# Altium PCB ase_flap.PcbDoc
Units mm, origin at the board's own origin, x right, y up, seen from the top; angles counter-clockwise.
Board outline 51.05 x 46.99 mm, 4 copper layers (Top Layer, Under top, Under bottom, Bottom Layer); 76 components, 52 nets, 266 pads, 103 vias.
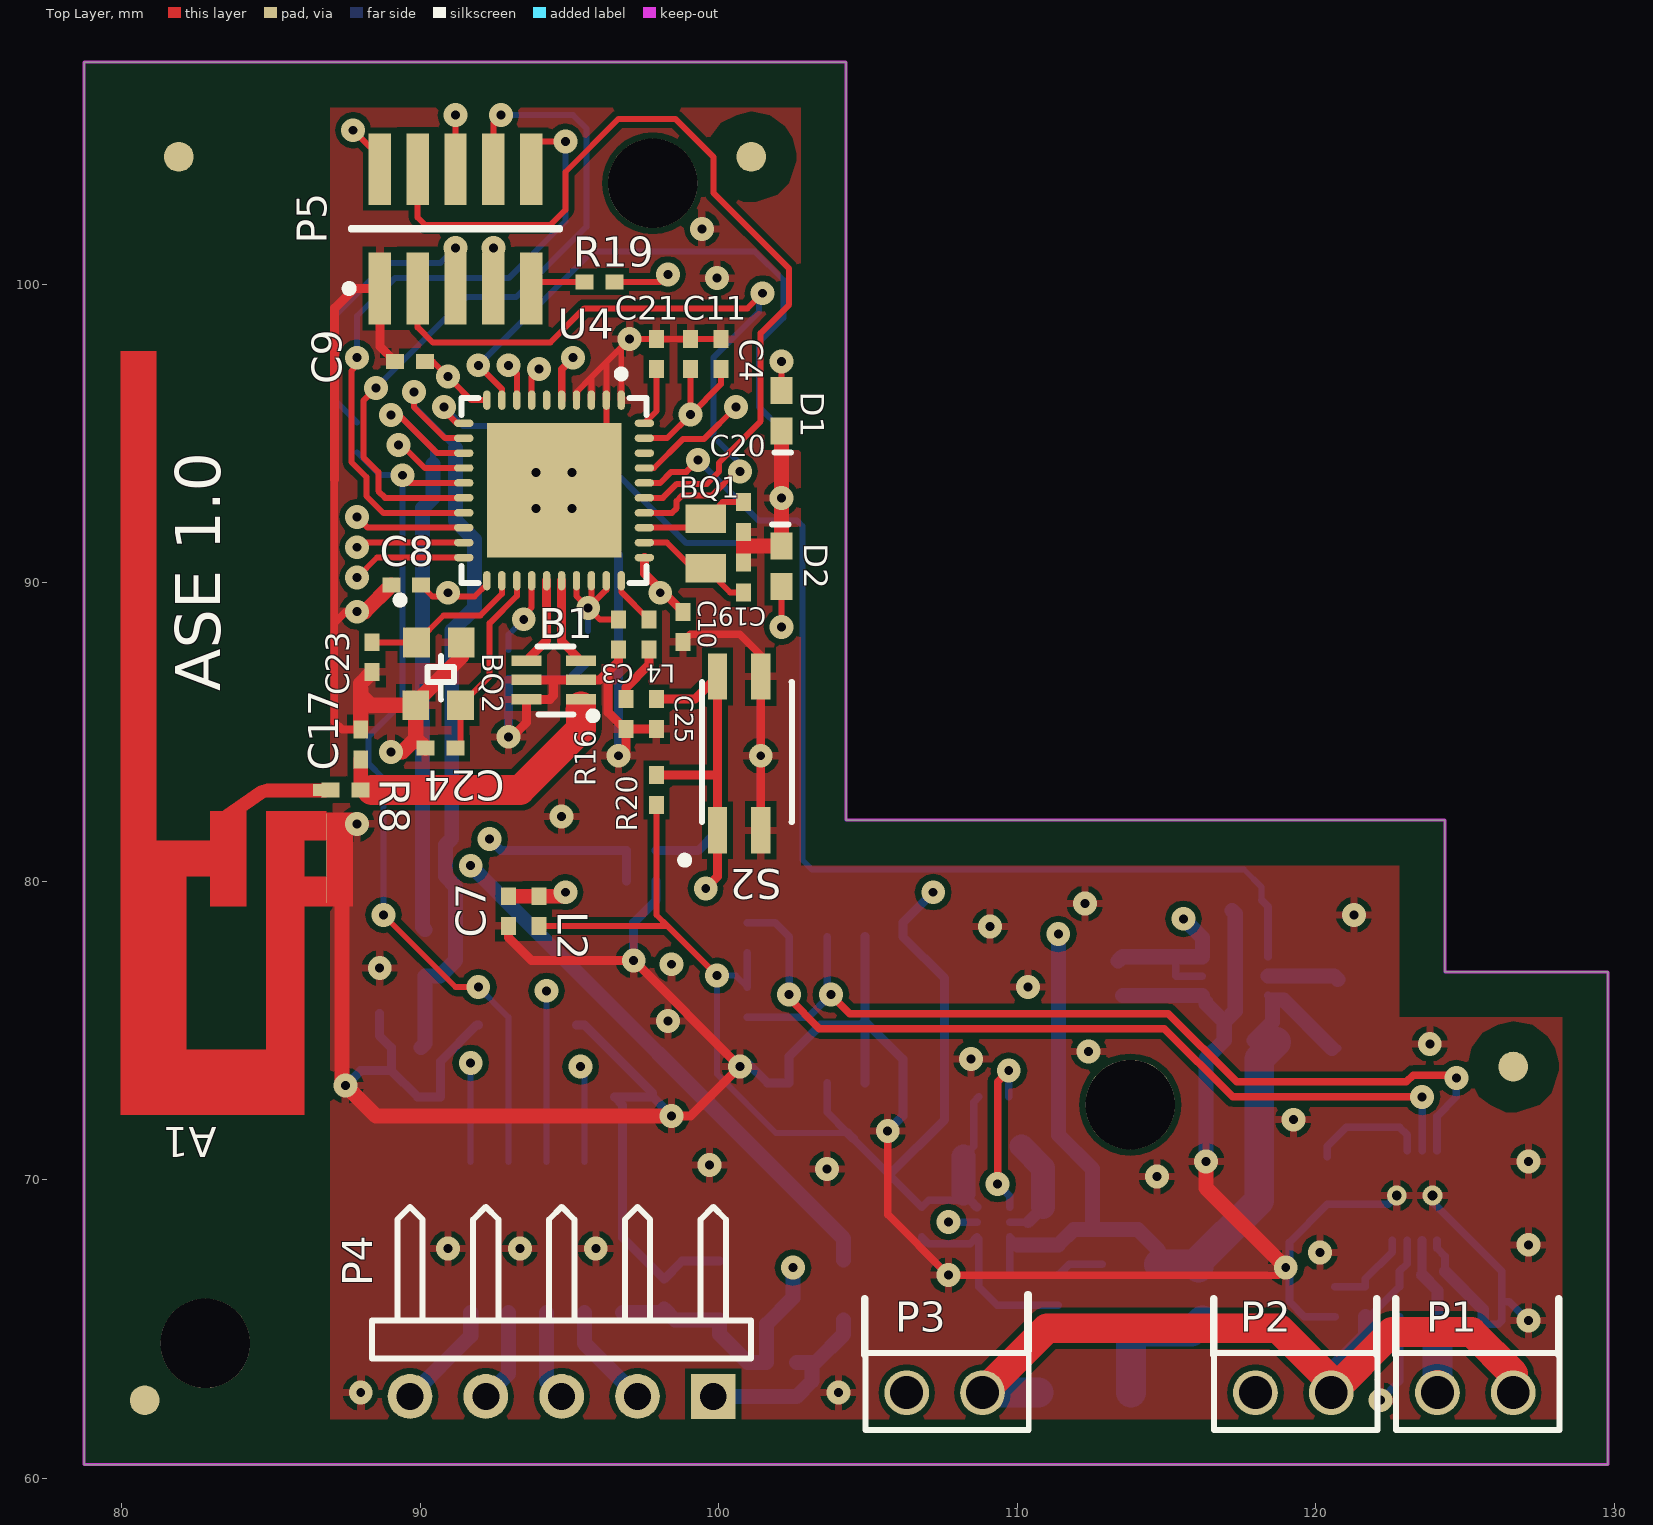
[diagram p0: Top Layer view]
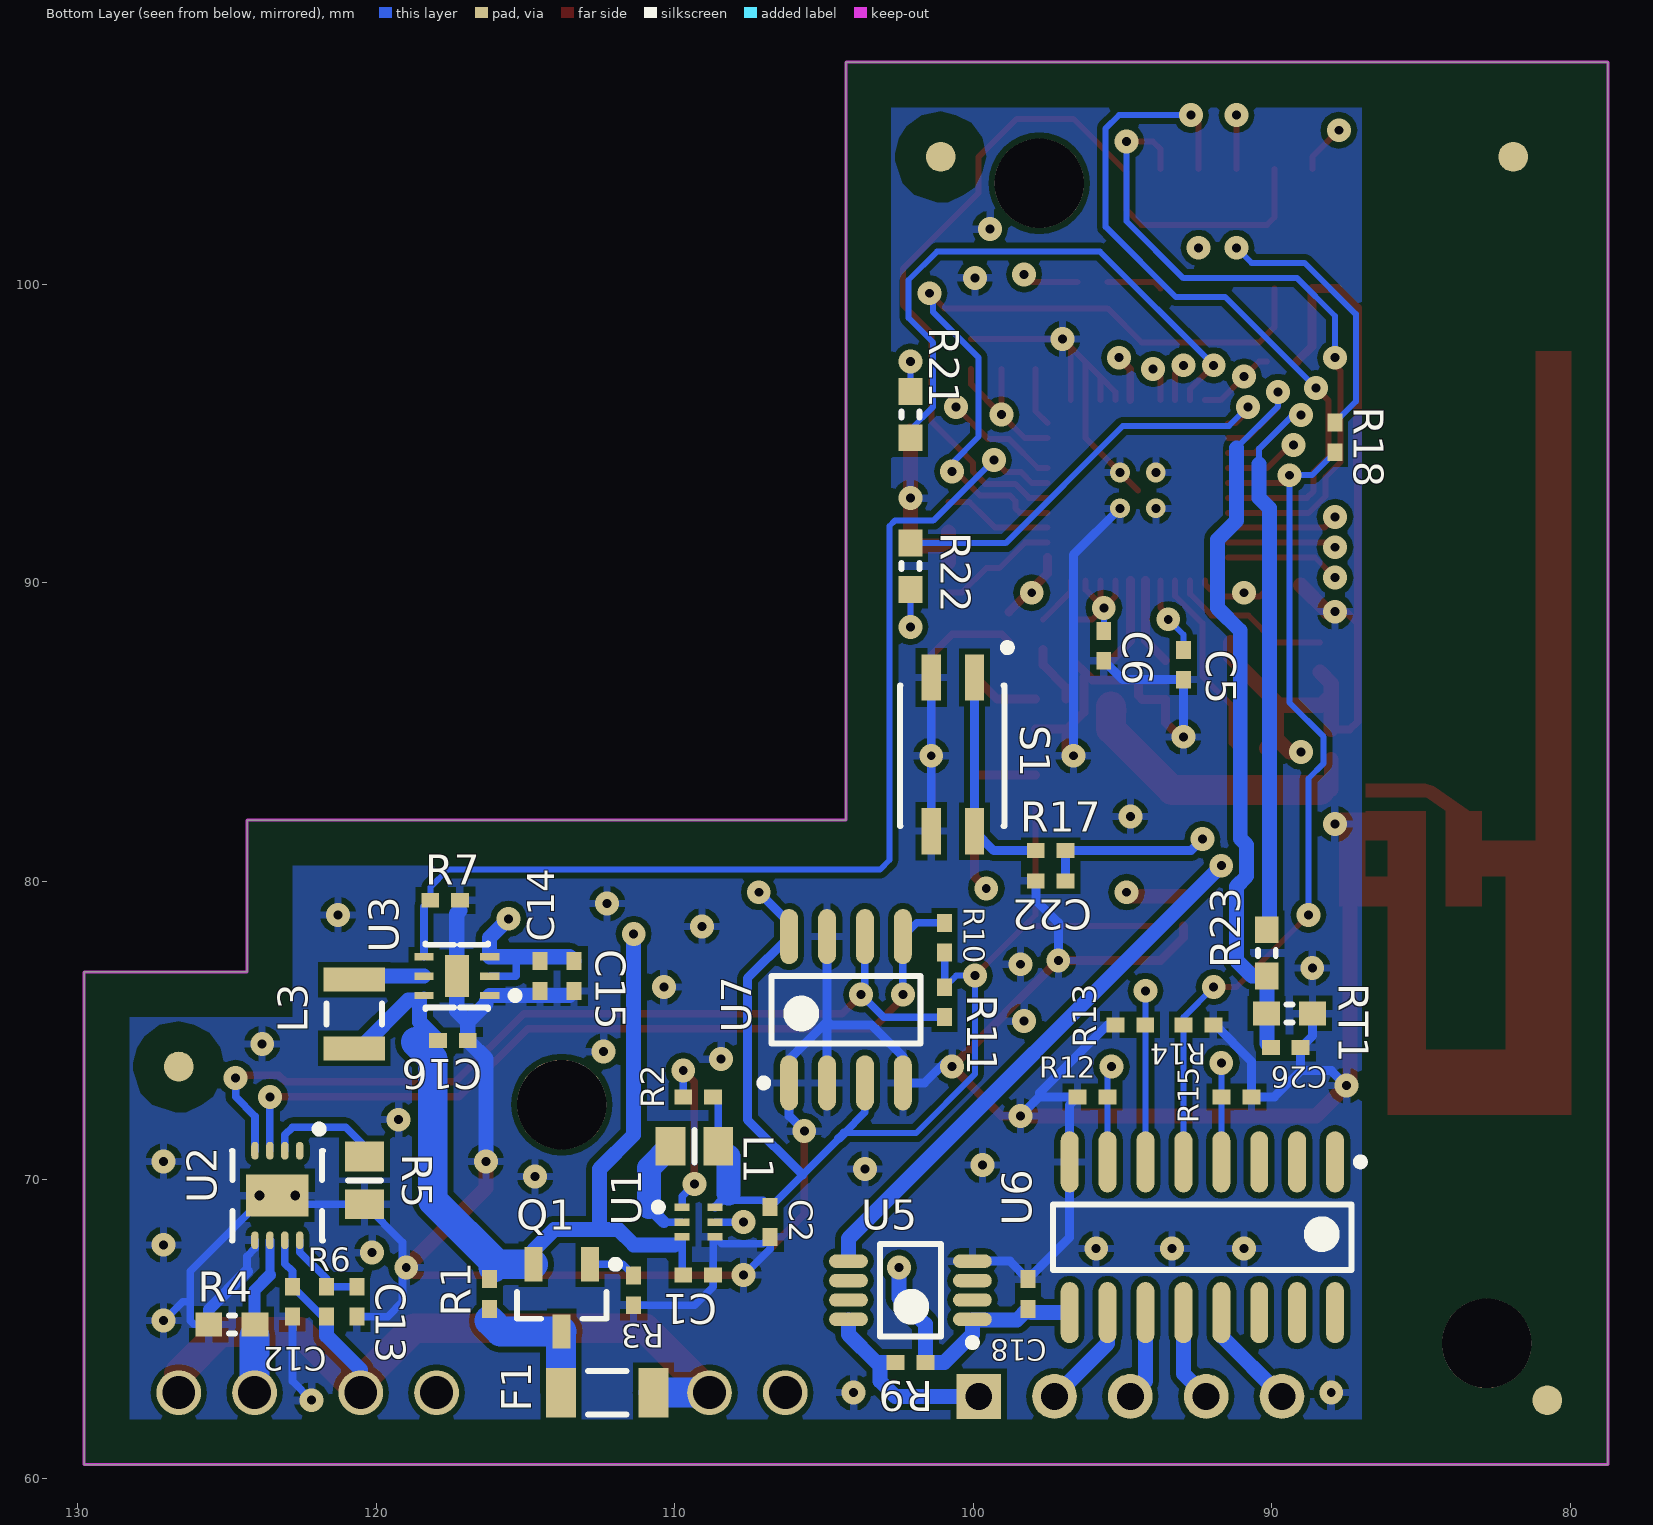
[diagram p1: Bottom Layer view, seen from below]
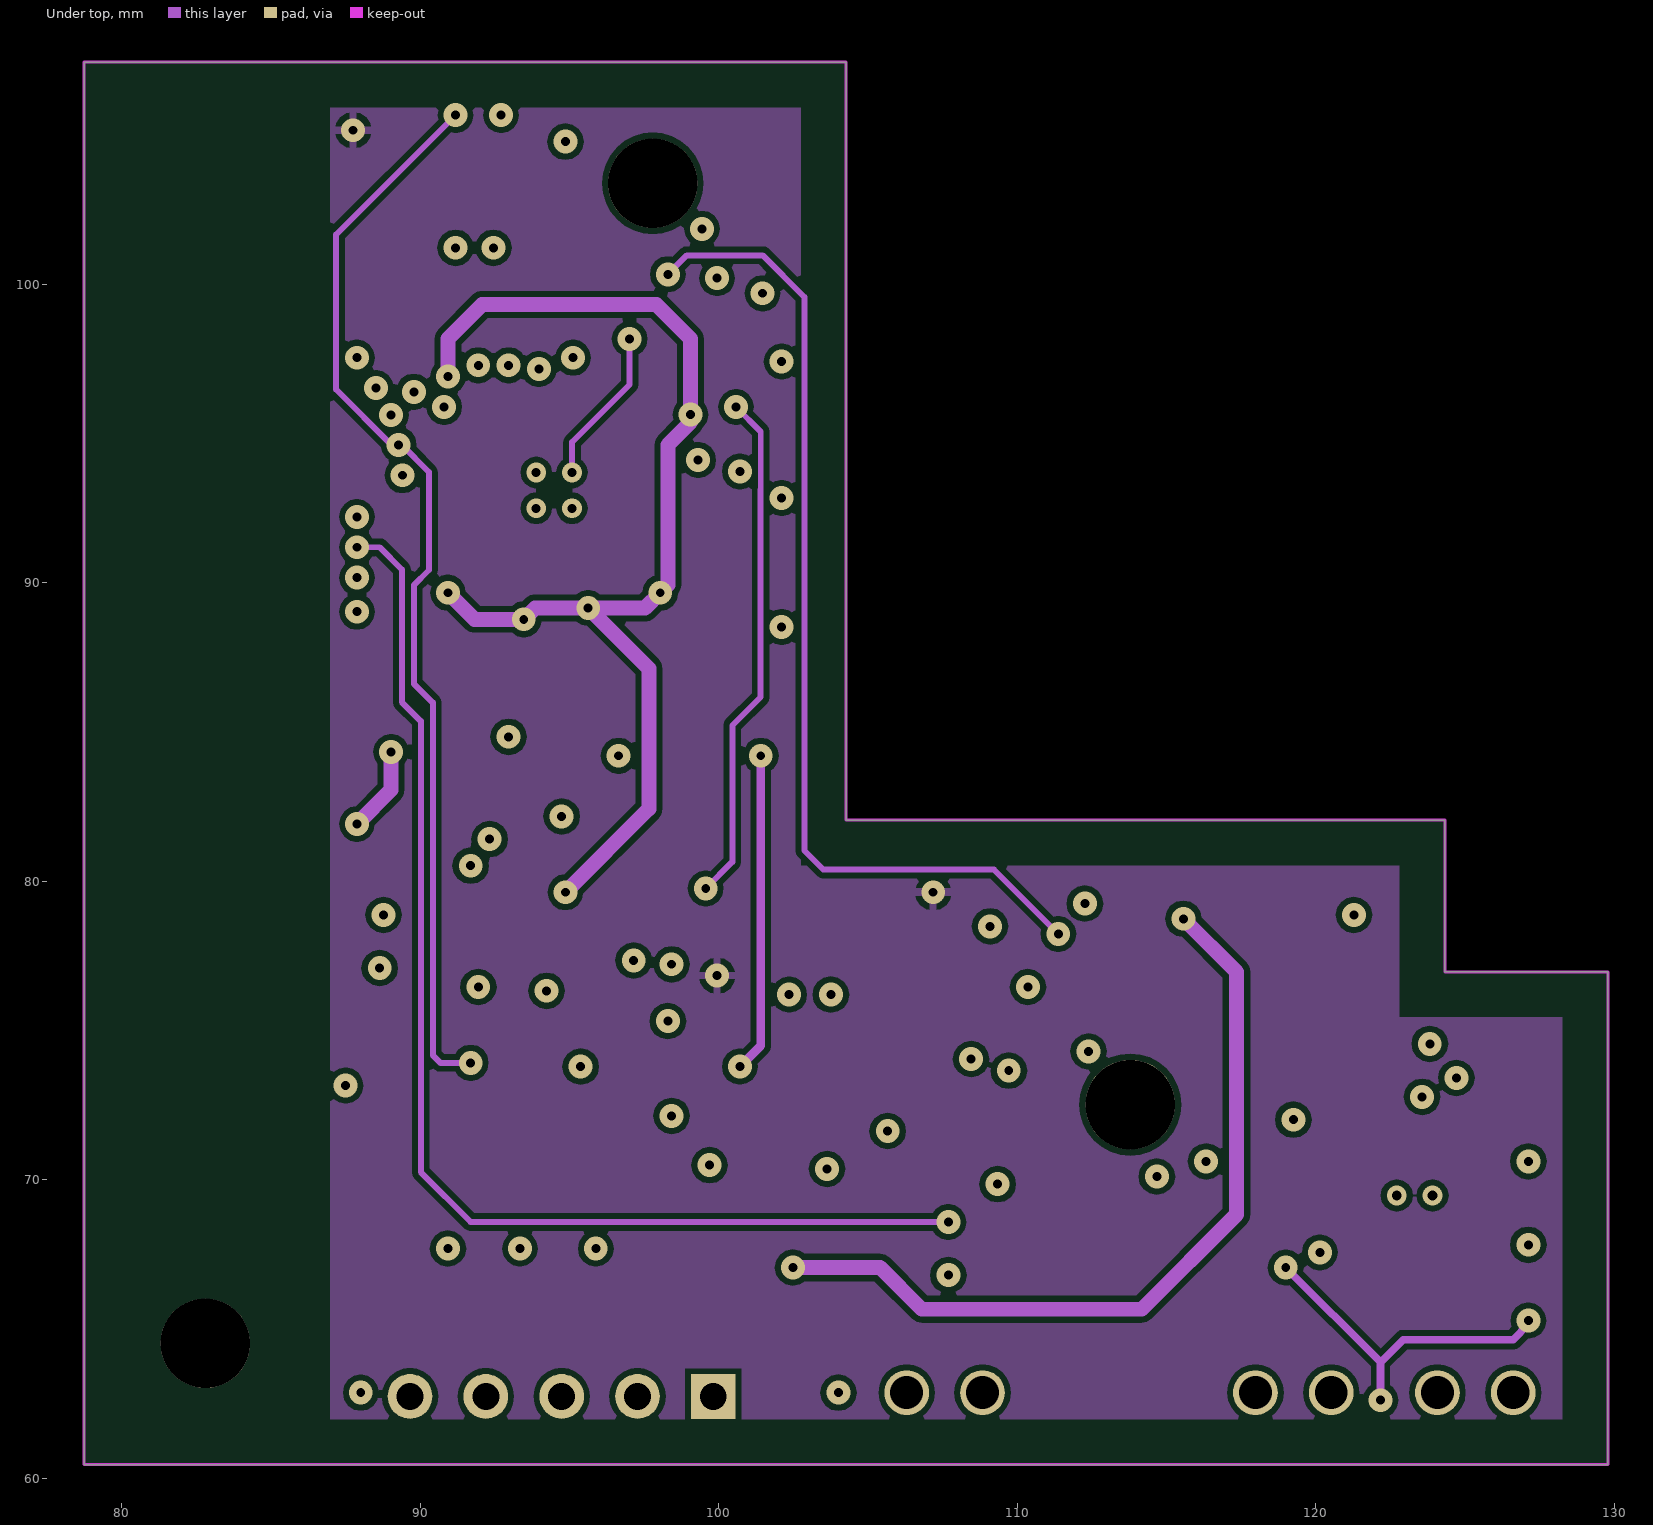
[diagram p2: Under top]
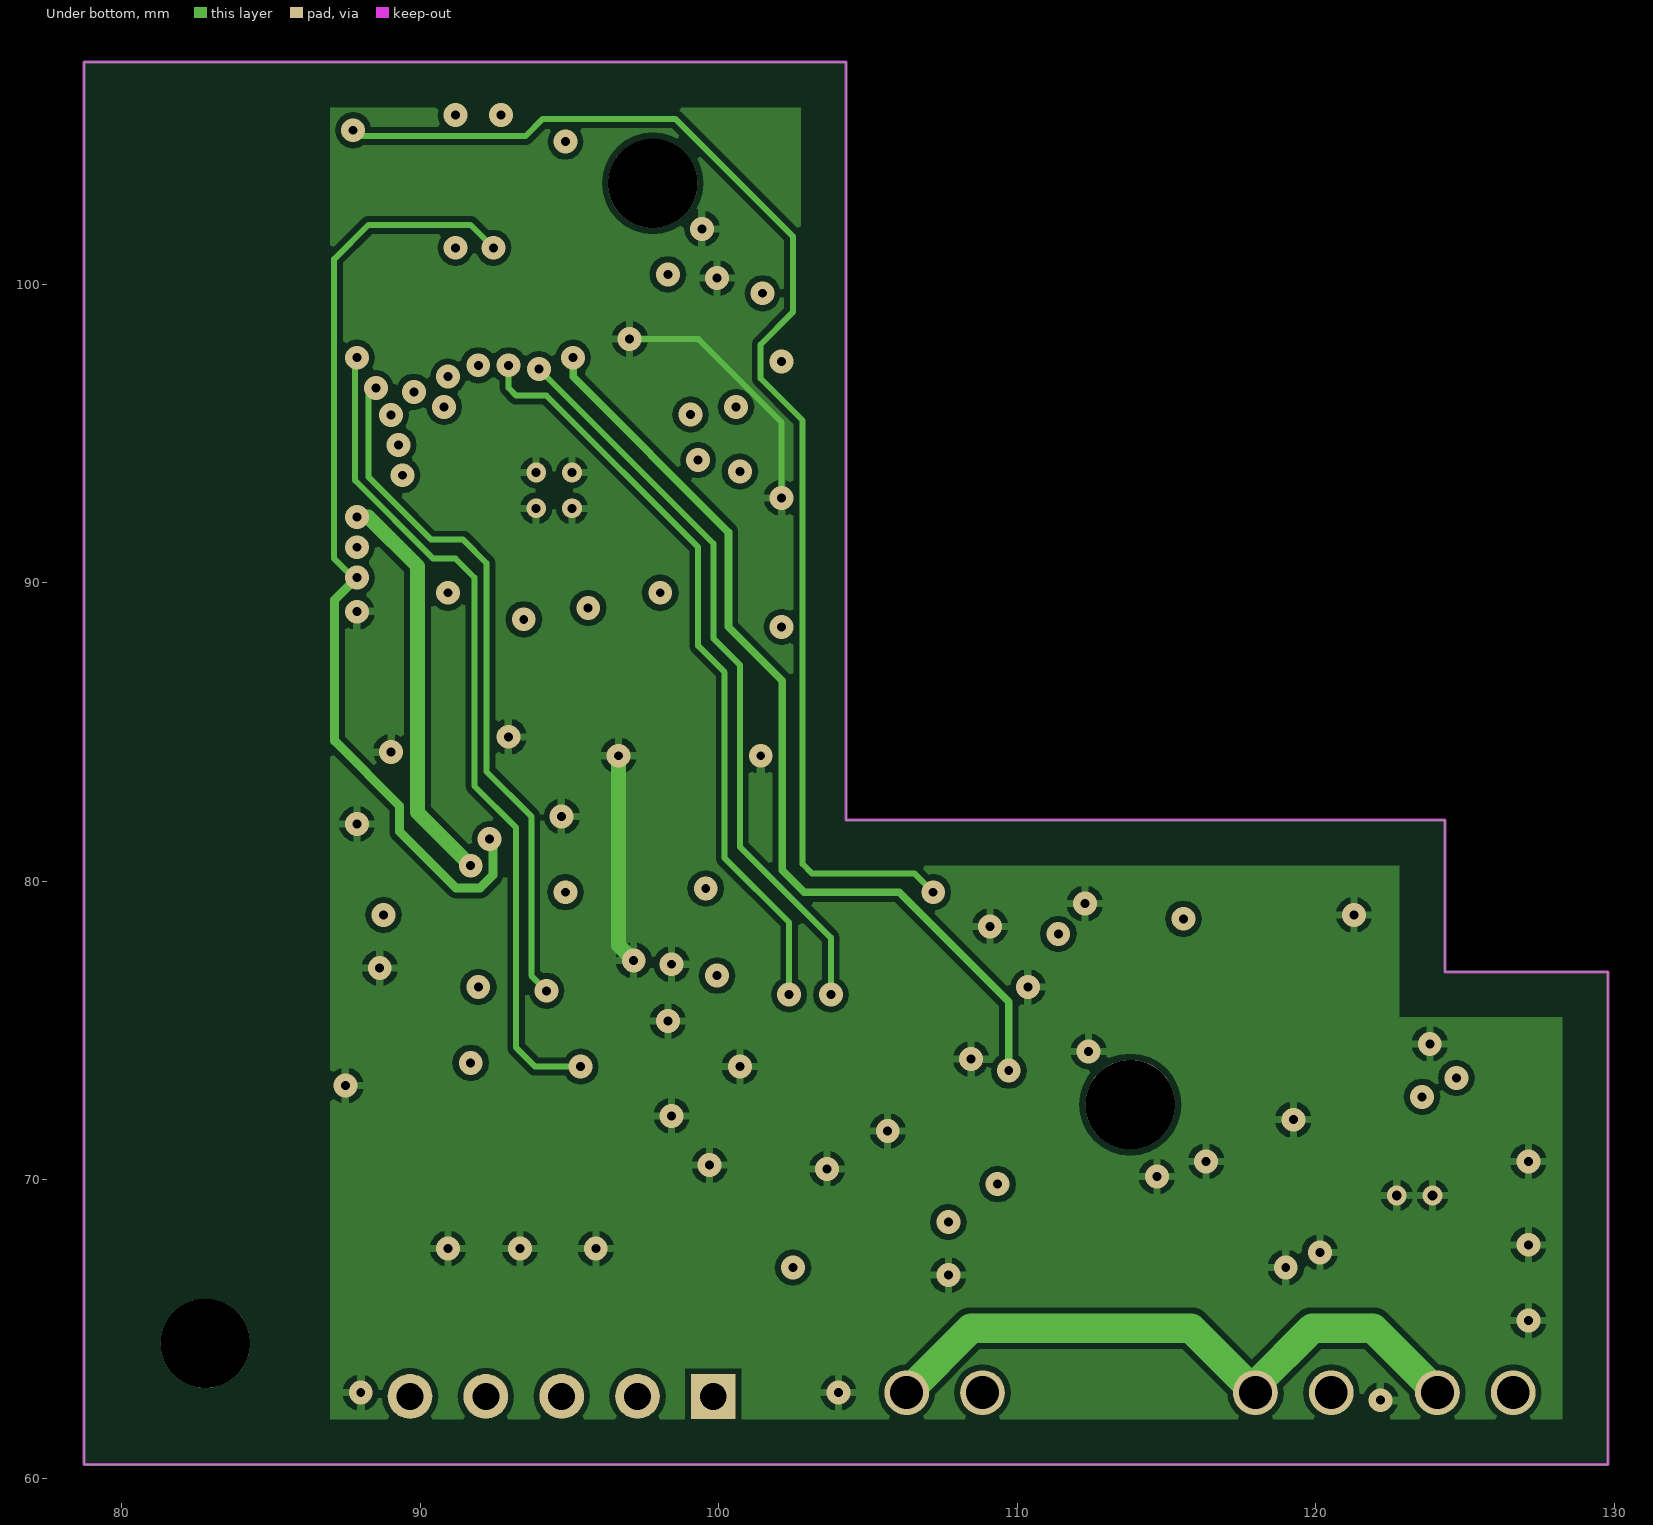
[diagram p3: Under bottom]

## Layer stack, top to bottom
Top Layer: signal copper 0.0356
Dielectric: core 0.32, FR-4, Dk 4.8
Under top: signal copper 0.0356
Dielectric: prepreg 0.32, FR-4, Dk 4.8
Under bottom: signal copper 0.0356
Dielectric: core 0.32, FR-4, Dk 4.8
Bottom Layer: signal copper 0.0356

## Board outline
78.74,60.452 78.74,107.442 104.267,107.442 104.267,82.042 124.333,82.042 124.333,76.962 129.794,76.962 129.794,60.452

## Design rules (kind name [scope] priority, off if disabled: settings)
Clearance [All] p1: gap=0.2
PolygonConnect [All] p1: connectstyle=Relief reliefconductorwidth=0.254 reliefentries=4 polygonreliefangle="90 Angle"
RoutingVias [All] p1: holewidth=0.711 width=1.27 viastyle="Through Hole" minholewidth=0.711 minwidth=1.27 maxholewidth=0.711 maxwidth=1.27
SilkscreenOverComponentPads [All] p1: minsilkscreentomaskgap=0.254
SolderMaskExpansion [All] p1: expansion=0
Width [All] p1: maxlimit=1 minlimit=0.2 preferedwidth=0.254
27 further rules are at their usual default settings.

## Components (designator, comment, footprint, x,y, rotation, side; value= is the part's Value field where it differs from the comment)
A1 "ANT" "F ant" 86.868,82.804 r90 top
B1 "BALUN" 2450BM15A0002 94.488,86.741 r180 top
BQ1 "Crystal" FC-12M 99.568,91.313 r90 top
BQ2 "Crystal" 403C11A32M00000 90.678,86.868 r270 top
C1 "Capacitor" 0402 109.22,66.802 r180 bottom
C2 "Capacitor" 0402 106.807,68.58 r270 bottom
C3 "Capacitor" 0402 96.647,88.265 r270 top
C4 "Capacitor" 0402 100.076,97.663 r90 top
C5 "Capacitor" 0402 92.964,87.249 r270 bottom
C6 "Capacitor" 0402 95.631,87.884 r270 bottom
C7 "Capacitor" 0402 92.964,78.994 r270 top
C8 "Capacitor" 0402 89.535,89.916 r180 top
C9 "Capacitor" 0402 89.662,97.409 r180 top
C10 "Capacitor" 0402 98.806,88.519 r270 top
C11 "Capacitor" 0402 99.06,97.663 r90 top
C12 "Capacitor" 0402 122.809,65.913 r270 bottom
C13 "Capacitor" 0402 120.65,65.913 r270 bottom
C14 "Capacitor" 0402 114.519,76.82 r270 bottom
C15 "Capacitor" 0402 113.376,76.82 r270 bottom
C16 "Capacitor" 0402 117.44,74.661 r180 bottom
C17 "Capacitor" 0402 88.011,84.582 r90 top
C18 "Capacitor" 0402 98.171,66.167 r90 bottom
C19 "Capacitor" 0402 100.838,90.17 r270 top
C20 "Capacitor" 0402 100.838,92.202 r90 top
C21 "Capacitor" 0402 97.917,97.663 r90 top
C22 "Capacitor" 0402 97.409,80.01 r0 bottom
C23 "Capacitor" 0402 88.392,87.503 r90 top
C24 "Capacitor" 0402 90.678,84.455 r0 top
C25 "Capacitor" 0402 97.917,85.598 r270 top
C26 "Capacitor" 0402 89.535,74.422 r180 bottom
D1 "Led" LED0603 102.108,95.758 r270 top
D2 "Led" LED0603 102.108,90.551 r90 top
F1 "Fuse, slow 0,5A" SF1206S0502 112.268,62.865 r0 bottom
L1 "Inductor" 6-0805_L 109.347,71.12 r180 bottom
L2 "Inductor" 0402 93.98,78.994 r90 top
L3 "Inductor" 1008 120.742,75.55 r90 bottom
L4 "Inductor" 0402 97.663,88.265 r90 top
P1 "Connector" BAT_CON 126.619,62.865 r180 top
P2 "Connector" BAT_CON 120.523,62.865 r180 top
P3 "Connector" BAT_CON 108.839,62.865 r180 top
P4 "24BYJ48" HDR1X5H 99.822,62.738 r180 top
P5 "*" 20021121-00010C4LF 91.186,101.854 r90 top
Q1 "IRLML6302GTRPBF" SOT-23_N 113.792,66.04 r270 bottom
R1 "Blob" 0402 116.205,66.167 r270 bottom
R2 "Resistor" 0402 109.22,72.771 r0 bottom
R3 "Resistor" 0402 111.379,66.294 r270 bottom
R4 "Resistor" 0603 124.841,65.151 r0 bottom
R5 "Resistor" 6-0805_L 120.396,69.977 r270 bottom
R6 "Resistor" 0402 121.666,65.913 r90 bottom
R7 "Resistor" 0402 117.694,79.36 r180 bottom
R8 "Blob" 0402 87.503,83.058 r180 top
R9 "Resistor" 0402 102.108,63.881 r180 bottom
R10 "Resistor" 0402 100.965,78.105 r270 bottom
R11 "Resistor" 0402 100.965,75.946 r90 bottom
R12 "Resistor" 0402 96.012,72.771 r0 bottom
R13 "Resistor" 0402 94.742,75.184 r0 bottom
R14 "Resistor" 0402 92.456,75.184 r180 bottom
R15 "Resistor" 0402 91.186,72.771 r180 bottom
R16 "Resistor" 0402 96.901,85.598 r270 top
R17 "Resistor" 0402 97.409,81.026 r180 bottom
R18 "Blob" 0402 87.884,94.869 r270 bottom
R19 "Blob" 0402 96.012,100.076 r0 top
R20 "Resistor" 0402 97.917,83.058 r90 top
R21 "Resister" 0603 102.108,95.631 r270 bottom
R22 "Resister" 0603 102.108,90.551 r90 bottom
R23 "Resistor" 0603 90.17,77.597 r90 bottom
RT1 "Thermistor" 0603 89.408,75.565 r180 bottom
S1 "Button" EVQP2402W 100.711,84.201 r270 bottom
S2 "Button" EVQP2402W 100.711,84.328 r90 top
U1 "TPS62730" 6SON 109.205,68.58 r180 bottom
U2 "STC3100" DFN8 123.317,69.469 r270 bottom
U3 "TPS61240DRVT" WSON6 117.305,76.82 r0 bottom
U4 "CC2530F256" QFN40 94.488,93.091 r270 top
U5 "AD8217BRMZ-R7" 8MSOP 102.108,66.294 r0 bottom
U6 "ULN2003ADR" 16SOIC 92.329,68.072 r270 bottom
U7 "M24M02" SO8 104.267,75.692 r90 bottom

## Footprints (in the part's own frame and the unit in brackets; to place one, negate y for a bottom-side part, rotate by r counter-clockwise, add the part's x,y. Pads: shape width x height; smd on the part's side, far side on the other; paste and mask are expansions set on the pad)
6-0805_L [mm] "Chip Resistor, Body 2.0x1.2mm, IPC High Density"
  rect 1x1.3 smd: 1(-0.8,0) 2(0.8,0)
  silkscreen extent 0,-0.55 0,0.55, body extent -1.07,-0.7 1.07,0.7, height 0.7
6SON [mm] "IC DCDC CONV STP-DN SYNC LP 6SON"
  rect 0.5x0.25 smd: 1(-0.55,0.5) 2(-0.55,0) 3(-0.55,-0.5) 4(0.55,-0.5) 5(0.55,0) 6(0.55,0.5)
  silkscreen extent -1.48,0.38 -1.23,0.62, body extent -0.52,-0.75 0.53,0.75, height 0.6
8MSOP [mm] "MSOP, 8-Leads, Body 3,1x3,1mm (max), Pitch 0,65mm, IPC High Density"
  oval 1.3x0.45 smd: 1(-2.075,0.975) 2(-2.075,0.325) 3(-2.075,-0.325) 4(-2.075,-0.975) 5(2.075,-0.975) 6(2.075,-0.325) 7(2.075,0.325) 8(2.075,0.975)
  silkscreen extent -2.2,-1.55 1.02,1.87, body extent -1.55,-1.55 1.55,1.55, height 1.1
16SOIC [mm] "TRANS 7 NPN DARL 50V 500MA 16SO"
  oval 2.05x0.6 smd: 1(-2.525,4.445) 2(-2.525,3.175) 3(-2.525,1.905) 4(-2.525,0.635) 5(-2.525,-0.635) 6(-2.525,-1.905) 7(-2.525,-3.175) 8(-2.525,-4.445) 9(2.525,-4.445) 10(2.525,-3.175) 11(2.525,-1.905) 12(2.525,-0.635) 13(2.525,0.635) 14(2.525,1.905) 15(2.525,3.175) 16(2.525,4.445)
  silkscreen extent -2.65,-5 1.1,5.42, body extent -2,-5 2,5, height 1.75
0402 [mm] "Chip Capacitor, Body 1.0x0.5mm, IPC High Density"
  rect 0.6x0.5 smd: 1(-0.5,0) 2(0.5,0)
  body extent -0.55,-0.3 0.55,0.3, height 1.3
403C11A32M00000 [mm] "CRYSTAL 32MHZ 10PF SMD"
  rect 1x0.9 smd: 1(-1.125,-0.8) 2(0.975,-0.825) 3(0.975,0.675) 4(-1.125,0.7)
  silkscreen extent -2.67,-1.47 0.77,0.45, body extent -1.7,-1.22 1.53,1.15, height 0.85
0603 [mm] "0603, 2-Leads, Body 1,6x0,8mm, IPC High Density"
  rect 0.9x0.8 smd: 1(-0.775,0) 2(0.775,0)
  silkscreen extent -0.1,-0.3 0.1,0.3, body extent -0.8,-0.4 0.8,0.4, height 0.5
1008 [mm]
  rect 0.8x2.05 smd: 1(-1.15,0) 2(1.15,0)
  silkscreen extent -0.35,-0.93 0.35,0.92, body extent -1.25,-1 1.25,1, height 0.6
2450BM15A0002 [mm]
  rect 1x0.35 smd: 1(-0.9,0.65) 2(-0.9,0) 3(-0.9,-0.65) 4(0.925,-0.65) 5(0.925,0) 6(0.925,0.65)
  silkscreen extent -1.43,-1.13 0.55,1.32, body extent -0.63,-1 0.63,1, height 0.7
20021121-00010C4LF [mm] "CONN HEADER 10POS DL UNSHRD SMD"
  rect 2.4x0.75 smd: 1(-2,2.54) 2(2,2.54) 3(-2,1.27) 4(2,1.27) 5(-2,0) 6(2,0) 7(-2,-1.27) 8(2,-1.27) 9(-2,-2.54) 10(2,-2.54)
  silkscreen extent -2.12,-3.5 0.02,3.69, body extent -0.75,-3.5 0.75,3.5, height 5
BAT_CON [mm]
  round 1.5 hole 1.1: 1(0,0) 2(2.54,0)
  silkscreen extent -1.55,-1.33 3.92,1.25
DFN8 [mm]
  oval 0.6x0.25 smd: 1(-1.5,0.75) 2(-1.5,0.25) 3(-1.5,-0.25) 4(-1.5,-0.75) 5(1.5,-0.75) 6(1.5,-0.25) 7(1.5,0.25) 8(1.5,0.75)
  rect 1.4x2.1 smd: 9(0,0)
  silkscreen extent -2.35,-1.53 1.5,1.53, body extent -1.5,-1.5 1.5,1.5, height 0.9
EVQP2402W [mm] "QFN, 4-Leads, Body 3,5x4,7mm (max), Pitch 1,70mm, IPC High Density"
  rect 1.55x0.65 smd: 1(-2.625,0.75) 2(-2.625,-0.7) 3(2.525,0.75) 4(2.525,-0.7)
  silkscreen extent -3.75,-1.75 2.35,1.97, body extent -2.35,-1.75 2.35,1.75, height 2.5
"F ant" [mm] "F antenna 2.4Ghz"
  rect 0.4x0.4 smd paste+0: 1(0.254,0.254)
  rect 3x0.01 smd: 2(-2.032,0)
  Top Layer region: 0,2.03 0.379,2.291 -0.577,3.681 -0.956,3.421
  Top Layer region: 0,0 0.46,0 0.46,2.03 0,2.03
  Top Layer region: -3.65,0.74 -0.45,0.74 -0.45,2.03 -3.65,2.03
  Top Layer region: -3.65,2.69 -0.45,2.69 -0.45,3.9 -3.65,3.9
  Top Layer region: -10.63,0.74 -8.45,0.74 -8.45,4.7 -10.63,4.7
  Top Layer region: -10.63,5.7 14.95,5.7 14.95,6.91 -10.63,6.91
  Top Layer region: -10.63,4.7 -1.45,4.7 -1.45,5.7 -10.63,5.7
  Top Layer region: -8.45,0.74 -3.575,0.74 -3.575,2.03 -8.45,2.03
  Top Layer region: -2.65,3.9 -1.45,3.9 -1.45,4.7 -2.65,4.7
  Top Layer region: -1.45,0 -0.45,0 -0.45,0.74 -1.45,0.74
  Top Layer region: -3.65,0 -2.65,0 -2.65,0.74 -3.65,0.74
  Top Layer region: 0,2.03 0.46,2.03 0.379,2.291
FC-12M [mm]
  rect 0.95x1.35 smd: 1(-0.825,0) 2(0.825,0)
  body extent -1.02,-0.6 1.02,0.6, height 0.6
HDR1X5H [mm] "Connector; Header; 5 Position; Right Angle"
  rect 1.5x1.5 hole 0.9: 1(0,0)
  round 1.5 hole 0.9: 2(2.54,0) 3(5.08,0) 4(7.62,0) 5(10.16,0)
  silkscreen extent -1.27,-6.35 11.43,-1.27
LED0603 [mm] "Molded Diode, 2-Leads, Body 1,7x0,9mm, IPC High Density"
  rect 0.9x0.75 smd: 1(-0.675,0) 2(0.675,0)
  silkscreen extent 1.4,-0.23 1.4,0.32, body extent -0.9,-0.5 0.9,0.5, height 0.85
QFN40 [mm]
  oval 0.65x0.25 smd: 1(-3.025,2.25) 2(-3.025,1.75) 3(-3.025,1.25) 4(-3.025,0.75) 5(-3.025,0.25) 6(-3.025,-0.25) 7(-3.025,-0.75) 8(-3.025,-1.25) 9(-3.025,-1.75) 10(-3.025,-2.25) 21(3.025,-2.25) 22(3.025,-1.75) 23(3.025,-1.25) 24(3.025,-0.75) 25(3.025,-0.25) 26(3.025,0.25) 27(3.025,0.75) 28(3.025,1.25) 29(3.025,1.75) 30(3.025,2.25)
  oval 0.25x0.65 smd: 11(-2.25,-3.025) 12(-1.75,-3.025) 13(-1.25,-3.025) 14(-0.75,-3.025) 15(-0.25,-3.025) 16(0.25,-3.025) 17(0.75,-3.025) 18(1.25,-3.025) 19(1.75,-3.025) 20(2.25,-3.025) 31(2.25,3.025) 32(1.75,3.025) 33(1.25,3.025) 34(0.75,3.025) 35(0.25,3.025) 36(-0.25,3.025) 37(-0.75,3.025) 38(-1.25,3.025) 39(-1.75,3.025) 40(-2.25,3.025)
  rect 4.5x4.5 smd: 41(0,0)
  silkscreen extent -4.02,-3.1 3.1,3.1, body extent -3.08,-3.08 3.08,3.08, height 1
SF1206S0502 [mm] "FUSE BOARD MNT 500MA 63VDC 1206"
  rect 1x1.65 smd: 1(-1.55,0) 2(1.55,0)
  silkscreen extent -0.65,-0.72 0.65,0.72, body extent -1.55,-0.77 1.55,0.77, height 0.6
SO8 [mm] "SOIC, 8-Leads, Body 5,0x4,0mm (max), Pitch 1,27mm, IPC High Density"
  oval 1.85x0.6 smd: 1(-2.45,1.905) 2(-2.45,0.635) 3(-2.45,-0.635) 4(-2.45,-1.905) 5(2.45,-1.905) 6(2.45,-0.635) 7(2.45,0.635) 8(2.45,1.905)
  silkscreen extent -2.57,-2.5 1.12,2.88, body extent -2,-2.5 2,2.5, height 1.75
SOT-23_N [mm] "SOT23, 3-Leads, Body 2.9x1.3mm, Pitch 0.95mm, Lead Span 2.5mm, IPC Medium Density"
  rect 1.15x0.6 smd: 1(-1.125,0.95) 2(-1.125,-0.95) 3(1.125,0)
  silkscreen extent -1.25,-1.5 0.7,1.92, body extent -0.7,-1.5 0.7,1.5, height 1.1
WSON6 [mm] "QFN, 6-Leads, Body 2,1x2,1mm (max), Pitch 0,65mm, IPC Medium Density"
  rect 0.65x0.25 smd: 1(-1.1,0.65) 2(-1.1,0) 3(-1.1,-0.65) 4(1.1,-0.65) 5(1.1,0) 6(1.1,0.65)
  rect 0.8x1.4 smd: 7(0,0)
  silkscreen extent -2.07,-1.1 1.05,1.1, body extent -1.05,-1.05 1.05,1.05, height 0.8

## Part data
A1: "Inverted-F Antenna"
B1: "BALUN JTI MATCHED ZIGBEE"
BQ1: library part 6LC:308C, "CRYSTAL 32.768KHZ 12.5PF SMD"
BQ2: library part HC-49SMD, "CRYSTAL 32MHZ 10PF SMD"
C1 C2 C3 C14 C15 C16 C18: library part Cap, "CAP CER 2.2UF 6.3V 20% X5R 0402"
C4 C12 C21: library part Cap, "CAP CER 1UF 6.3V 10% X5R 0402"
C5 C6 C7 C8 C9 C10 C11 C22 C25 C26: library part Cap, "CAP CER 0.1UF 10V 20% X5R 0402"
C13: library part Cap, "CAP CER 0.22UF 10V 10% X5R 0402"
C17: library part Cap, "CAP CER 0.5PF 50V NP0 0402"
C19 C20: library part Cap, "CAP CER 22PF 50V 5% NP0 0402"
C23 C24: library part Cap, "CAP CER 15PF 50V 5% NP0 0402"
D1: library part LED0, "LED SUPER RED CLEAR 0603 SMD"
D2: library part LED0, "LED GREEN CLEAR THIN 0603 SMD"
F1: library part "Fuse 2", "FUSE 0,5A 63V 1206 SLOW"
L1: "INDUCTOR 2.2UH 0805"
L2: "FILTER CHIP 1000 OHM 250MA 0402"
L3: "INDUCTOR POWER 1UH 2.2A 1008"
L4: "INDUCTOR 6.8NH 300MA 0402"
P1 P2 P3: library part "Header 2", "CONN HEADER VERT 2POS .100 TIN"
P4: library part "Header 5H", "Header, 5-Pin, Right Angle"
P5: library part "Header 5X2", "CONN HEADER 10POS DL UNSHRD SMD"
Q1: library part IRLML6302, "HEXFET Power MOSFET"
R1 R8 R18 R19: library part Res3, "RES 0.0 OHM 1/10W JUMP 0402 SMD"
R2 R3 R7 R12 R13 R14 R15: library part Res3, "RES 10K OHM 1/10W 5% 0402 SMD"
R4: library part Res3, "RES 0.02 OHM 1/4W 1% 0603"
R5: library part Res3, "RES 200K OHM 1/8W .1% 0805 SMD"
R6: library part Res3, "RES 1K OHM 1/10W 1% 0402 SMD"
R9: library part Res3, "RES 0.5 OHM 1/16W 1% 0402 SMD"
R10 R11 R17: library part Res3, "RES 2.7K OHM 1/10W 5% 0402 SMD"
R16 R20: library part Res3, "RES 56K OHM 1/10W 1% 0402 SMD"
R21 R22: library part Res3, "RES 200 OHM 1/10W 5% 0603 SMD"
R23: library part Res3, "RES 2.0K OHM 1/10W 5% 0603 SMD"
RT1: library part "Res Thermal", "THERMISTOR NTC 1K OHM 5% 0603"
S1 S2: library part SW-PB, "SWITCH TACTILE SPST-NO 0.02A 15V"
U1: "IC DCDC CONV STP-DN SYNC LP 6SON"
U2: "IC BATTERY MON W/GAUGE 8-DFN"
U3: "IC REG BOOST SYNC 5V 0.45A 6SON"
U4: "IC SOC IEEE 802.15.4/ZIG 40VQFN"
U5: "IC CURRENT MONITOR HI SIDE 8MSOP"
U6: library part ULN2004ADR, "TRANS 7 NPN DARL 50V 500MA 16SO"
U7: "IC EEPROM 2MBIT 1MHZ 8SO"

## Free pads (board coordinates)
  round 3 hole 3: 0(82.804,64.516) 0(97.79,103.378) 0(113.792,72.517)
  round 1 smd mask+1: 1(80.772,62.611) 1(81.915,104.267) 1(101.092,104.267) 1(126.619,73.787)
  round 1 smd far side mask+1: 1(80.772,62.611) 1(81.915,104.267) 1(101.092,104.267) 1(126.619,73.787)

## Via types
v1: diameter 0.8, hole 0.3, Top Layer to Bottom Layer, tented both sides, 97 vias
v2: diameter 0.66, hole 0.3, Top Layer to Bottom Layer, tented top, 4 vias
v3: diameter 0.66, hole 0.33, Top Layer to Bottom Layer, tented top, 2 vias

## Nets (pads, with @x,y where several pads share a name; then routed paths per layer and width w, separated by ;. In a path a pad name is that pad's centre, name@x,y a point inside that pad or via, vN(x,y) a via of type N, cw(c..) or ccw(c..) an arc to the next point about the centre after c; other vN are vias at no path point)
5V_ON: R7.1 U3.4 U4.36 | length 35.9
  Top Layer w0.2: U4.36 98.04,93.341 98.412,93.713 98.92,93.713 v1(99.314,94.107)
  Bottom Layer w0.2: v1(99.314,94.107) 101.345,92.076 102.632,92.076 102.808,91.9 102.808,80.707 103.124,80.391 117.602,80.391 118.194,79.799 R7.1
  Bottom Layer w0.254: R7.1 118.405,79.149 U3.4
5VCC: C14.1 C15.1 C18.1 R9.2 U3.2 U3.3 U5.1 U6.9 | length 42.8
  Under top w0.5: v1(102.489,67.056) 105.41,67.056 106.807,65.659 114.173,65.659 117.348,68.834 117.348,76.962 v1(115.57,78.74)
  Bottom Layer w0.254: C18.1@98.051,65.547 C18.1 ; 115.316,77.47 115.316,76.835 115.331,76.82 U3.2
  Bottom Layer w0.5: U6.9 C18.1@98.051,65.547 ; C18.1 98.544,65.294 100.033,65.294 100.033,64.813 100.965,63.881 R9.2 101.608,65.159 102.489,66.04 v1(102.489,67.056)
  Bottom Layer w0.508: C15.1 113.526,77.47 115.316,77.47 U3.3 116.205,78.105 v1(115.57,78.74)
A: P4.2 U6.10 | length 3.5
  Bottom Layer w0.508: U6.10 95.504,64.516 P4.2
B: P4.3 U6.11 | length 3
  Bottom Layer w0.508: U6.11 94.234,63.246 P4.3
BAT_VCC: C1.1 C16.1 L3.1 Q1.2 R1.1 R19.2 U1.3 U3.6 | length 67.9
  Top Layer w0.2: R19.2 98.044,100.076 v1(98.298,100.33)
  Under top w0.2: v1(98.298,100.33) 98.933,100.965 101.473,100.965 102.87,99.568 102.87,81.026 103.505,80.391 109.22,80.391 v1(111.379,78.232)
  Bottom Layer w0.254: C1.1 109.755,66.837 U1.3 110.017,67.818 ; Q1.2 Q1.2@114.742,67.63 ; U3.6 118.56,76.015 ; L3.1@120.545,74.4 L3.1
  Bottom Layer w0.5: 110.017,67.818 111.379,67.818 111.887,68.326 112.522,68.326 ; v1(111.379,78.232) 111.379,71.501 112.522,70.358 112.522,68.326 ; Q1.2@114.742,67.63 114.046,68.326 112.522,68.326
  Bottom Layer w0.508: C16.1 118.56,75.281 118.56,76.015 118.93,76.015 L3.1@120.545,74.4
  Bottom Layer w1: Q1.2 115.969,67.165 ; 116.078,67.056 115.969,67.165 ; 118.681,74.612 118.11,74.041 118.11,69.306 115.969,67.165
C: P4.4 U6.12 | length 3.1
  Bottom Layer w0.508: P4.4 92.964,63.5 U6.12
CC2530_CLK: P5.6 R15.1 U4.14 U6.4 | length 44.4
  Top Layer w0.2: v1(89.281,94.615) 89.154,94.488 89.509,94.488 90.156,93.841 U4.14 ; P5.6 v1(91.186,105.664)
  Under top w0.2: v1(91.186,105.664) 87.184,101.662 87.184,96.469 89.038,94.615 v1(89.281,94.615) 89.382,94.615 90.297,93.7 90.297,90.424 89.789,89.916 89.789,86.614 90.424,85.979 90.424,74.168 90.678,73.914 v1(91.694,73.914)
  Bottom Layer w0.2: R15.1 91.694,72.763 U6.4 ; R15.1@91.694,72.779 v1(91.694,73.914)
CC2530_DC: P5.3 U4.34 | length 24.9
  Top Layer w0.2: P5.3 89.916,98.552 90.424,98.044 94.361,98.044 95.504,99.187 100.965,99.187 v1(101.473,99.695) v1@101.6,99.822 ; U4.34 98.437,92.341 98.593,92.497 98.593,92.737 98.769,92.913 99.771,92.913 100.584,93.726 v1(100.711,93.726)
  Bottom Layer w0.2: v1(100.711,93.726) 100.711,94.006 99.822,94.895 99.822,97.536 101.346,99.06 101.346,99.568 v1(101.473,99.695)
CC2530_DD: P5.4 U4.35 | length 29.8
  Top Layer w0.2: P5.4 89.916,102.235 90.17,101.981 94.361,101.981 94.869,102.489 94.869,103.759 96.647,105.537 98.552,105.537 99.822,104.267 99.822,103.06 102.362,100.52 102.362,99.314 101.408,98.36 101.408,95.413 100.011,94.016 100.011,93.719 99.605,93.313 98.603,93.313 98.131,92.841 U4.35
CC2530_MISO: P5.10 R12.1 U4.17 U6.7 | length 54.1
  Top Layer w0.2: v1(87.884,97.536) 88.011,97.409 87.699,97.097 87.699,94.038 88.203,93.534 88.203,92.899 88.773,92.329 90.043,92.329 90.055,92.341 U4.17 ; P5.10 93.726,104.521 93.98,104.775 v1(94.869,104.775)
  Under bottom w0.2: v1(87.884,97.536) 87.819,97.471 87.819,93.426 90.44,90.805 91.186,90.805 91.821,90.17 91.821,83.185 93.218,81.788 93.218,74.422 93.853,73.787 v1(95.377,73.787)
  Bottom Layer w0.2: v1(87.884,97.536) 87.884,98.933 89.154,100.203 92.964,100.203 94.869,102.108 v1(94.869,104.775) ; U6.7 95.504,72.763 R12.1 v1@95.512,73.652
CC2530_MOSI: P5.8 R13.1 U4.16 U6.6 | length 53.1
  Top Layer w0.2: v1@88.265,96.266 88.099,96.1 88.099,94.204 88.603,93.7 88.603,93.065 88.827,92.841 U4.16 ; P5.8 92.456,105.41 v1(92.71,105.664)
  Under bottom w0.2: v1(88.519,96.52) 88.265,96.266 88.265,93.545 90.37,91.44 91.44,91.44 92.221,90.659 92.221,83.674 93.726,82.169 93.726,76.835 v1(94.234,76.327)
  Bottom Layer w0.2: v1(88.519,96.52) 91.567,99.568 93.218,99.568 95.569,101.919 95.569,105.218 95.123,105.664 v1(92.71,105.664) ; U6.6 94.234,75.176 R13.1 94.234,75.192 v1(94.234,76.327)
CC2530_RESET: C22.1 P5.7 R17.2 U4.20 | length 41.9
  Top Layer w0.2: v1(87.884,90.17) 88.555,90.841 U4.20
  Under bottom w0.2: v1(87.884,90.17) 87.757,90.17 87.122,90.805 87.122,100.838 88.265,101.981 91.694,101.981 v1(92.456,101.219)
  Under bottom w0.3: v1(87.884,90.17) 87.134,89.42 87.134,84.697 89.316,82.515 89.316,81.661 91.209,79.768 92.005,79.768 92.444,80.207 92.444,81.292 v1(92.329,81.407)
  Bottom Layer w0.3: v1(92.329,81.407) 92.71,81.026 R17.2 C22.1
CC2530_SS: R14.1 R18.2 U4.15 U6.5 | length 29.9
  Top Layer w0.2: v1(88.773,78.867) 91.186,76.454 v1(91.948,76.454) ; v1(89.408,93.599) 89.666,93.341 U4.15
  Bottom Layer w0.2: R18.2 88.654,93.599 v1(89.408,93.599) 89.408,85.979 88.265,84.836 88.265,83.947 88.773,83.439 v1(88.773,78.867) ; v1(91.948,76.454) 92.956,75.446 R14.1 92.964,75.176 U6.5
CC_VCC: C3.1 C4.1 C5.1 C6.1 C7.1 C8.1 C9.1 C10.1 C11.1 L2.2 U4.10 U4.21 U4.24 U4.27 U4.28 U4.29 U4.31 U4.39 | length 60.6
  Top Layer w0.2: C8.1 90.416,89.535 91.821,89.535 92.238,89.952 U4.21 ; C9.1 90.424,97.409 v1(90.932,96.901) ; v1@91.059,96.774 91.717,96.116 U4.10 ; v1@93.599,89.027 93.738,89.166 U4.24 ; v1@94.734,79.494 v1(94.869,79.629) ; U4.27 95.238,89.547 v1(95.631,89.154) 96.02,88.765 C3.1 ; U4.28 95.738,89.261 96.238,89.761 U4.29 ; U4.39 98.27,94.841 v1(99.06,95.631) ; C11.1 v1(99.06,95.631) ; C4.1 100.076,96.647 v1(99.06,95.631)
  Top Layer w0.3: U4.31 97.513,90.312 C10.1
  Top Layer w0.5: C7.1 v1@94.734,79.494
  Under top w0.2: v1@99.06,95.377 v1(99.06,95.631)
  Under top w0.5: v1(90.932,89.662) 91.821,88.773 v1(93.472,88.773) 93.853,89.154 v1(95.631,89.154) ; v1(90.932,96.901) 90.932,98.171 92.075,99.314 97.917,99.314 99.06,98.171 v1(99.06,95.631) ; v1(94.869,79.629) 97.663,82.423 97.663,87.122 v1(95.631,89.154) ; v1@99.06,95.377 98.298,94.615 98.298,89.916 v1(98.044,89.662) 97.536,89.154 v1(95.631,89.154)
  Bottom Layer w0.2: C5.1 92.964,88.265 v1(93.472,88.773) ; C6.1 v1(95.631,89.154)
D: P4.5 U6.13 | length 3.7
  Bottom Layer w0.508: P4.5 91.694,64.77 U6.13
GND: A1.2 B1.2 B1.5 B1.6 BQ2.2 BQ2.4 C1.2 C2.2 C3.2 C4.2 C5.2 C6.2 C7.2 C8.2 C9.2 C10.2 C11.2 C12.2 C13.2 C14.2 C15.2 C16.2 C17.2 C18.2 C19.1 C20.1 C21.2 C22.2 C23.1 C24.1 C25.2 C26.2 D1.2 D2.2 P5.1 R3.2 R4.2 R5.2 R7.2 R12.2 R13.2 R14.2 R15.2 R16.2 RT1.2 S1.2 S1.4 S2.2 S2.4 U1.4 U2.5 U2.9 U3.1 U3.7 U4.1 U4.2 U4.3 U4.4 U4.41 U5.4 U6.8 U7.1 U7.2 U7.4 U7.7 | length 271
  Top Layer w0.2: U4.41 96.238,94.841 U4.2 96.238,97.381 ; U4.4 95.238,96.381 95.738,96.881 ; U4.3 95.738,96.881 ; U4.1 v1@96.738,97.881 ; C4.2 C11.2 C21.2 v1(97.02,98.163) v1@96.738,97.881 ; 95.738,96.881 96.238,97.381 ; 96.238,97.381 v1@96.738,97.881
  Top Layer w0.254: 87.122,93.448 87.122,88.646 ; v1(87.884,89.027) 87.503,89.027 87.122,88.646 ; C17.2 87.384,85.082 87.122,85.344 87.122,88.646 ; C10.2 99.052,88.265 100.711,88.265 101.411,87.565 S2.4 ; v1(105.664,71.628) 105.664,68.834 v1(107.696,66.802) 118.745,66.802 v1(118.999,67.056)
  Top Layer w0.3: 87.134,93.46 87.134,99.199 87.789,99.854 P5.1 88.654,99.846 88.654,97.917 C9.2 ; C7.2 92.964,78.105 93.726,77.343 v1(97.155,77.343) v1(100.711,73.787) 99.06,72.136 v1(98.425,72.136) ; v1(92.964,84.836) 93.091,84.836 93.563,85.308 B1.6 94.346,86.091 94.476,86.221 94.476,86.741 ; B1.5 94.476,86.741 ; C3.2 96.647,87.376 96.203,86.931 ; v1@96.901,84.328 R16.2 ; C25.2 R16.2 ; S2.2 v1(101.411,84.201) S2.4 ; 94.476,86.741 B1.2 96.012,86.741 96.203,86.931 ; 96.203,86.931 96.301,86.833 96.301,85.653 96.856,85.098 R16.2
  Top Layer w0.5: v1@87.376,73.152 87.376,79.756 ; v1(87.503,73.152) 88.519,72.136 v1(98.425,72.136)
  Top Layer w0.508: C17.2 88.011,86.233 ; v1@88.146,89.027 C8.2 ; C23.1 88.011,86.622 88.011,86.233 ; v1(89.027,84.328) 89.401,84.328 89.853,84.78 ; BQ2.2@89.853,85.985 91.378,87.51 BQ2.4 ; C24.1 89.853,84.78 ; C19.1 100.838,91.313 ; C20.1 100.838,91.313 ; D1.2 v1(102.108,92.837) D2.2 100.925,91.226 100.838,91.313 ; v1(116.332,70.612) 116.332,69.723 v1(118.999,67.056) ; 88.011,86.233 88.351,85.893 BQ2.2 89.853,84.78
  Under top w0.2: v2(95.088,93.691) 95.088,94.707 97.02,96.639 v1(97.02,98.163)
  Under top w0.254: v1(118.999,67.056) 122.174,63.881 ; v1(122.174,62.611) 122.174,63.881 ; v1(127.127,65.278) 127.127,65.151 126.619,64.643 122.936,64.643 122.174,63.881
  Under top w0.3: v1(100.711,73.787) 101.411,74.487 v1(101.411,84.201)
  Under top w0.5: v1(87.884,81.915) 89.027,83.058 v1(89.027,84.328)
  Under bottom w0.2: v1(97.02,98.163) 99.322,98.163 102.108,95.377 v1(102.108,92.837)
  Under bottom w0.5: v1(96.647,84.201) 96.647,77.851 v1(97.155,77.343)
  Bottom Layer w0.254: v1(107.696,66.802) 106.807,67.691 C2.2 107.034,67.853 108.428,67.853 U1.4 ; U1.4@108.72,68.015 C1.2 108.72,66.413 109.339,65.794 R3.2 ; C13.2 119.626,65.413 119.126,65.913 119.126,67.907 R5.2 122.425,69.177 v3(122.717,69.469) ; v1(122.174,62.611) 122.809,63.246 C12.2 ; v3(123.917,69.469) 123.917,69.25 126.238,66.929 126.238,65.913 ; U2.5 124.067,67.703 124.333,67.437 124.333,66.929 ; R4.2 126.111,65.151 126.238,65.278 126.238,65.913 ; v1(127.127,65.278) 126.492,65.913 126.238,65.913
  Bottom Layer w0.3: v1(87.503,73.152) 88.003,73.652 89.035,73.652 ; RT1.2 88.633,74.824 C26.2 89.035,73.652 ; R14.2 91.903,75.184 90.686,73.967 R15.2 89.916,72.771 89.035,73.652 ; v1(92.964,84.836) C5.2 94.996,86.749 C6.2 ; v2(95.088,92.491) 96.647,90.932 v1(96.647,84.201) ; R13.2 95.504,75.184 97.79,72.898 97.79,72.771 ; v1(97.155,77.343) 97.155,78.613 97.909,79.367 C22.2 ; v1(98.425,72.136) 97.79,72.771 ; U5.4 98.773,67.269 C18.2 96.774,68.064 U6.8 96.774,72.509 R12.2 97.79,72.771 ; v1@100.965,73.914 101.637,73.242 U7.4 102.362,74.128 103.418,75.184 104.775,75.184 104.902,75.311 ; S1.4 v1(101.411,84.201) S1.2 ; U7.2 104.902,75.311 ; U7.7 104.902,75.311 ; v1(105.664,71.628) 106.172,72.136 U7.1 106.172,74.041 104.902,75.311
  Bottom Layer w0.4: 124.333,66.929 125.616,65.646 R4.2
  Bottom Layer w0.508: C15.2@113.526,76.17 U3.1 ; v1(116.332,70.612) 116.332,74.053 C16.2 116.94,75.284 ; 116.332,75.946 116.332,75.892 116.94,75.284 ; 117.194,79.021 117.305,78.91 U3.7 117.305,75.649 116.94,75.284
  other v1: 88.011,62.865 104.013,62.865 120.142,67.564 90.932,67.691 93.345,67.691 95.885,67.691 127.127,67.818 114.681,70.104 103.632,70.358 99.695,70.485 127.127,70.612 119.253,72.009 108.458,74.041 112.395,74.295 123.825,74.549 98.298,75.311 110.363,76.454 88.646,77.089 98.425,77.216 109.093,78.486 121.285,78.867 112.268,79.248 94.742,82.169 99.949,100.203 99.441,101.854
  other v2: 93.888,92.491 93.888,93.691
LED1_1: D2.1 R22.1 | length 2.6
  Top Layer w0.2: v1(102.108,88.519) D2.1
  Bottom Layer w0.2: v1(102.108,88.519) R22.1
LED1_2: R22.2 U4.11 | length 14.3
  Top Layer w0.2: v1(90.805,95.885) 90.678,95.885 91.222,95.341 U4.11
  Bottom Layer w0.2: v1(90.805,95.885) 91.44,95.25 94.996,95.25 98.92,91.326 R22.2
LED2_1: D1.1 R21.1 | length 2
  Top Layer w0.2: D1.1 v1(102.108,97.409)
  Bottom Layer w0.2: R21.1 v1(102.108,97.409)
LED2_2: R21.2 U4.9 | length 19.6
  Top Layer w0.2: v1(91.948,97.282) 92.738,96.492 U4.9
  Bottom Layer w0.2: v1(91.948,97.282) 95.758,101.092 101.219,101.092 102.173,100.138 102.173,98.874 101.346,98.047 101.346,95.894 102.108,95.132 R21.2
NetA1_1: A1.1 R8.2
NetB1_1: B1.1 C17.1 R8.1 | length 9.6
  Top Layer w0.5: R8.1@88.011,83.066 C17.1
  Top Layer w1: 88.392,83.058 93.345,83.058 95.388,85.101 95.388,85.852 ; 95.377,85.725 95.388,85.714
NetB1_3: B1.3 U4.26 | length 2.9
  Top Layer w0.3: U4.26 94.738,88.041 B1.3
NetB1_4: B1.4 U4.25 | length 3
  Top Layer w0.3: B1.4 94.238,88.066 U4.25
NetBQ1_1: BQ1.1 C19.2 U4.32 | length 4
  Top Layer w0.2: U4.32 98.27,91.341 99.123,90.488 BQ1.1 100.386,89.67 C19.2
NetBQ1_2: BQ1.2 C20.2 U4.33 | length 3.7
  Top Layer w0.2: U4.33 99.271,91.841 BQ1.2 100.132,92.702 C20.2
NetBQ2_1: BQ2.1 C23.2 U4.22 | length 5.5
  Top Layer w0.2: C23.2 BQ2.1@89.868,88.003 ; BQ2.1 90.785,88.9 92.017,88.9 92.738,89.621 U4.22
NetBQ2_3: BQ2.3 C24.2 U4.23 | length 6.5
  Top Layer w0.2: C24.2 91.353,84.63 BQ2.3 92.329,86.869 92.329,88.646 93.238,89.555 U4.23
NetC12_1: C12.1 F1.1 P1.1 P2.1 P3.1 R6.1 U2.7 | length 30
  Top Layer w1: P3.1 110.998,65.024 118.745,65.024 120.523,63.246 P2.1 122.555,64.897 125.222,64.897 126.619,63.5 P1.1
  Bottom Layer w0.254: R6.1 121.797,65.413 122.797,66.413 C12.1 122.809,66.929 123.067,67.187 U2.7
  Bottom Layer w0.5: P2.1 120.523,63.627 121.666,64.77 R6.1
  Bottom Layer w1: P3.1 F1.1
NetC13_1: C13.1 R6.2 U2.8 | length 2.9
  Bottom Layer w0.254: C13.1 R6.2 121.666,66.675 122.567,67.576 U2.8
NetC21_1: C21.1 U4.40 | length 2
  Top Layer w0.2: U4.40 97.917,95.745 C21.1
NetF1_2: F1.2 Q1.3 R1.2 | length 4.6
  Bottom Layer w1: Q1.3 115.842,64.915 116.205,65.278 ; F1.2 Q1.3@113.818,64.889
NetL1_1: L1.1 U1.2 | length 3.7
  Bottom Layer w0.254: U1.2 110.363,68.58
  Bottom Layer w0.4: 110.363,68.58 110.871,69.088
  Bottom Layer w0.8: L1.1 110.871,70.396 110.871,69.088
NetL3_2: L3.2 U3.5 | length 2.4
  Bottom Layer w0.508: U3.5 120.622,76.82 L3.2
NetL4_1: L4.1 R16.1 | length 2
  Top Layer w0.3: R16.1 96.901,86.487 97.663,87.249 L4.1
NetL4_2: L4.2 U4.30 | length 1.7
  Top Layer w0.2: U4.30 96.738,89.69 L4.2
NetP1_2: P1.2 P2.2 P3.2 R4.1 U2.6 | length 27.1
  Top Layer w1: P1.2 P1.2@124.079,63.119
  Under bottom w1: P3.2 108.458,65.024 115.824,65.024 P2.2 117.983,63.119 119.888,65.024 121.92,65.024 P1.2
  Bottom Layer w0.3: 123.567,66.806 U2.6
  Bottom Layer w0.4: 123.567,66.806 124.079,66.294 R4.1@124.079,64.757
  Bottom Layer w1: P1.2 R4.1@124.079,64.757
NetP4_1: P4.1 R9.1 U5.8 | length 6.3
  Bottom Layer w0.5: P4.1 102.616,62.738 103.124,63.246 103.124,63.627 ; R9.1 103.251,63.881 104.183,64.813 U5.8@104.183,65.294
NetP5_5: P5.5 R18.1 | length 8.8
  Bottom Layer w0.2: R18.1 87.184,96.069 87.184,98.995 88.9,100.711 90.678,100.711 v1(91.186,101.219)
NetP5_9: P5.9 R19.1 | length 1.9
  Top Layer w0.2: P5.9 93.948,100.076 R19.1
NetQ1_1: Q1.1 R3.1 | length 1.6
  Bottom Layer w0.254: R3.1 111.75,67.165 Q1.1
NetR5_1: R5.1 U2.2 | length 3.9
  Bottom Layer w0.254: R5.1 120.396,71.12 121.031,71.755 122.809,71.755 123.067,71.497 U2.2
NetR17_1: R17.1 S1.1 S1.3 | length 7.5
  Bottom Layer w0.3: R17.1 99.311,81.026 S1.3 S1.1
REG_ON_OFF: U1.5 U4.19 | length 45.2
  Top Layer w0.2: v1(87.884,91.186) 88.039,91.341 U4.19
  Under top w0.2: v1(87.884,91.186) 88.646,91.186 89.389,90.443 89.389,85.998 90.024,85.363 90.024,70.25 91.694,68.58 v1(107.696,68.58)
  Bottom Layer w0.254: v1(107.696,68.58) U1.5
REG_STAT: R2.2 U1.1 U4.5 | length 39.1
  Top Layer w0.254: U4.5 94.738,97.151 v1(95.123,97.536) ; v1(109.347,69.85) 109.347,73.279 v1(109.72,73.652)
  Under bottom w0.254: v1(95.123,97.536) 95.123,96.901 100.33,91.694 100.33,88.519 102.138,86.711 102.138,80.361 102.87,79.629 106.045,79.629 109.72,75.954 v1(109.72,73.652)
  Bottom Layer w0.254: v1(109.347,69.85) 109.755,69.442 U1.1 ; R2.2 v1(109.72,73.652)
REINIT_1: C25.1 R20.2 S2.1 S2.3 U4.37 | length 33.4
  Top Layer w0.2: U4.37 97.836,93.841 98.802,94.807 99.506,94.807 v1(100.584,95.885) ; v1(100.584,95.885) 100.584,96.012 100.711,96.139 100.711,96.012 v1(100.584,95.885)
  Top Layer w0.3: R20.2 99.953,83.558 99.961,83.566 ; C25.1 99.206,86.098 S2.3 99.961,83.566 ; v1(99.568,79.756) 99.961,80.149 S2.1 99.961,83.566
  Under top w0.2: v1(99.568,79.756) 100.457,80.645 100.457,85.217 101.408,86.168 101.408,93.127 101.411,93.13 101.411,95.058 v1(100.584,95.885)
SCL: R11.1 U2.4 U4.7 U7.6 | length 56.2
  Top Layer w0.2: U4.7 93.738,96.913 v1(93.98,97.155)
  Top Layer w0.254: v1(103.759,76.2) 104.394,75.565 115.069,75.565 117.355,73.279 123.043,73.279 123.266,73.502 124.618,73.502 v1(124.714,73.406)
  Under bottom w0.2: v1(93.98,97.155) 99.822,91.313 99.822,88.138 100.711,87.249 100.711,81.153 103.759,78.105 v1(103.759,76.2)
  Bottom Layer w0.254: R11.1 103.005,75.446 v1(103.759,76.2) 103.632,76.327 U7.6 ; U2.4 124.067,72.124 124.714,72.771 v1(124.714,73.406)
SDA: R10.1 U2.3 U4.8 U7.5 | length 54.9
  Top Layer w0.2: v1(92.964,97.282) 93.238,97.008 U4.8
  Top Layer w0.254: v1(102.362,76.2) 102.362,76.073 103.378,75.057 114.935,75.057 117.217,72.775 v1(123.567,72.775)
  Under bottom w0.2: v1(92.964,97.282) 92.964,96.52 93.218,96.266 94.234,96.266 99.314,91.186 99.314,87.884 100.203,86.995 100.203,80.772 102.362,78.613 v1(102.362,76.2)
  Bottom Layer w0.254: R10.1 101.899,78.605 U7.5 v1(102.362,76.2) ; U2.3 v1(123.567,72.775)
TEMP1_ADC: C26.1 R23.1 RT1.1 U4.12 | length 26.7
  Top Layer w0.2: v1(89.789,96.393) 89.789,95.885 90.833,94.841 U4.12
  Bottom Layer w0.2: v1(89.789,96.393) 89.789,95.911 91.186,94.514
  Bottom Layer w0.5: C26.1 90.17,74.557 R23.1 90.665,76.822 91.186,77.343 91.186,79.824 90.844,80.166 90.844,81.212 91.059,81.427 91.059,88.392 91.821,89.154 91.821,91.44 91.186,92.075 91.186,94.514
TEMP_ON: R23.2 U4.13 | length 21.7
  Top Layer w0.2: v1@89.154,95.631 88.9,95.631 89.079,95.81 89.102,95.81 90.571,94.341 U4.13
  Bottom Layer w0.2: v1@89.1,95.543 89.369,95.543 90.424,94.488 90.424,93.98
  Bottom Layer w0.5: v1(89.028,95.615) v1@89.1,95.543 ; R23.2 90.082,78.46 90.082,92.495 90.424,92.837 90.424,93.98
V_CUR: U4.18 U5.5 | length 35.6
  Top Layer w0.2: v1(87.884,92.202) 88.245,91.841 U4.18
  Under bottom w0.5: v1(87.884,92.202) 88.265,92.202 89.916,90.551 89.916,82.296 v1(91.694,80.518)
  Bottom Layer w0.5: v1(91.694,80.518) 104.183,68.029 U5.5@104.183,67.31
VCC: C2.1 L1.2 L2.1 P5.2 R2.1 R10.2 R11.2 R20.1 U1.6 U7.3 U7.8 | length 89.4
  Top Layer w0.2: v1(87.757,105.156) 88.646,104.267 P5.2 ; L2.1 98.29,78.494 ; R20.1 97.917,78.867 98.29,78.494 ; v1(99.949,76.835) 98.29,78.494
  Under bottom w0.2: v1(87.757,105.156) 87.949,104.964 93.534,104.964 94.107,105.537 98.552,105.537 102.489,101.6 102.489,99.06 101.408,97.979 101.408,96.839 102.808,95.439 102.808,80.58 103.124,80.264 106.553,80.264 v1(107.188,79.629)
  Bottom Layer w0.2: R11.2 100.576,76.835 v1(99.949,76.835) 99.949,73.533 101.922,71.56 104.326,71.56
  Bottom Layer w0.254: R11.2 R10.2 ; U7.3 103.632,72.255 104.326,71.56 ; 104.513,71.374 105.723,70.163 C2.1 107.034,69.307 108.428,69.307 108.204,69.531 ; L1.2@108.204,70.777 L1.2 108.547,72.598 R2.1
  Bottom Layer w0.3: 104.326,71.56 104.513,71.374 ; 105.723,70.163 107.569,72.009 107.569,76.745 U7.8 106.172,78.613 v1(107.188,79.629) ; 108.428,69.307 U1.6
  Bottom Layer w0.8: 108.204,69.531 L1.2@108.204,70.777
pads on no net: U2.1 U4.6 U4.38 U5.2 U5.3 U5.6 U5.7 U6.1 U6.2 U6.3 U6.14 U6.15 U6.16

## Polygon pours and split planes (outlines as drawn)
GND on Under bottom "Bottom Layer-No Net" (solid, pour order 7): 86.995,105.918 102.743,105.918 102.743,80.645 102.808,80.58 102.87,80.518 103.505,80.518 122.809,80.518 122.809,75.438 128.27,75.438 128.27,61.976 86.995,61.976
VCC on Under top "Bottom Layer-No Net" (solid, pour order 5): 86.995,105.918 102.743,105.918 102.743,80.518 122.809,80.518 122.809,75.438 128.27,75.438 128.27,61.976 86.995,61.976
GND on Bottom Layer "Bottom Layer-No Net" (solid, pour order 3): 86.995,105.918 86.995,61.976 128.27,61.976 128.27,75.438 122.809,75.438 122.809,80.518 102.743,80.518 102.743,105.918
GND on Top Layer "Top Layer-No Net" (solid, pour order 2): 86.995,105.918 86.995,61.976 128.27,61.976 128.27,75.438 122.809,75.438 122.809,80.518 102.743,80.518 102.743,105.918

## Keep-outs
Keep-Out Layer:
  lines w0.1: 78.74,60.452 78.74,107.442 104.267,107.442 104.267,82.042 124.333,82.042 124.333,76.962 129.794,76.962 129.794,60.452 124.333,60.452 78.74,60.452

## Other copper
Top Layer:
  rectangle net GND: 86.741,81.354 87.757,82.296
  rectangle net GND: 86.741,79.154 87.757,80.137
  rectangle net GND: 86.868,80.137 87.757,81.661
  pour cut-out: 80.391,104.267 80.518,103.759 80.772,103.251 81.153,102.997 81.661,102.743 82.042,102.743 82.804,102.997 83.185,103.378 83.439,104.14 83.439,104.394 83.312,104.902 83.058,105.283 82.55,105.664 81.915,105.791 81.407,105.664 80.899,105.41 80.518,104.902
  pour cut-out: 125.095,73.787 125.222,73.279 125.476,72.771 125.857,72.517 126.365,72.263 126.746,72.263 127.508,72.517 127.889,72.898 128.143,73.66 128.143,73.914 128.016,74.422 127.762,74.803 127.254,75.184 126.619,75.311 126.111,75.184 125.603,74.93 125.222,74.422
  pour cut-out: 99.568,104.267 99.695,103.759 99.949,103.251 100.33,102.997 100.838,102.743 101.219,102.743 101.981,102.997 102.362,103.378 102.616,104.14 102.616,104.394 102.489,104.902 102.235,105.283 101.727,105.664 101.092,105.791 100.584,105.664 100.076,105.41 99.695,104.902
  pour cut-out: 79.248,62.611 79.375,62.103 79.629,61.595 80.01,61.341 80.518,61.087 80.899,61.087 81.661,61.341 82.042,61.722 82.296,62.484 82.296,62.738 82.169,63.246 81.915,63.627 81.407,64.008 80.772,64.135 80.264,64.008 79.756,63.754 79.375,63.246
Bottom Layer:
  pour cut-out: 80.391,104.267 80.518,103.759 80.772,103.251 81.153,102.997 81.661,102.743 82.042,102.743 82.804,102.997 83.185,103.378 83.439,104.14 83.439,104.394 83.312,104.902 83.058,105.283 82.55,105.664 81.915,105.791 81.407,105.664 80.899,105.41 80.518,104.902
  pour cut-out: 125.095,73.787 125.222,73.279 125.476,72.771 125.857,72.517 126.365,72.263 126.746,72.263 127.508,72.517 127.889,72.898 128.143,73.66 128.143,73.914 128.016,74.422 127.762,74.803 127.254,75.184 126.619,75.311 126.111,75.184 125.603,74.93 125.222,74.422
  pour cut-out: 99.568,104.267 99.695,103.759 99.949,103.251 100.33,102.997 100.838,102.743 101.219,102.743 101.981,102.997 102.362,103.378 102.616,104.14 102.616,104.394 102.489,104.902 102.235,105.283 101.727,105.664 101.092,105.791 100.584,105.664 100.076,105.41 99.695,104.902
  pour cut-out: 79.248,62.611 79.375,62.103 79.629,61.595 80.01,61.341 80.518,61.087 80.899,61.087 81.661,61.341 82.042,61.722 82.296,62.484 82.296,62.738 82.169,63.246 81.915,63.627 81.407,64.008 80.772,64.135 80.264,64.008 79.756,63.754 79.375,63.246

## Silkscreen, mask and mechanical layers (free items; w line width, h text height)
Top Overlay:
  lines w0.254: 104.902,64.135 104.902,66.014 ; 110.363,64.262 110.363,66.141 ; 116.586,64.135 116.586,66.014 ; 122.047,64.135 122.047,66.014 ; 122.682,64.135 122.682,66.014 ; 128.143,64.135 128.143,66.014
  text "ASE 1.0" at 83.312,86.36 h1.52 r90
Mechanical 1:
  lines w0.1: 78.74,107.442 97.79,107.442
  lines w0.254: 78.74,61.976 124.333,61.976 129.794,61.976 ; 78.74,64.516 82.804,64.516 ; 78.74,105.918 104.267,105.918 ; 80.264,60.452 80.264,107.442 ; 80.264,67.056 82.804,67.056 ; 82.804,60.452 82.804,64.516 ; 85.344,61.976 85.344,64.516 ; 86.995,58.293 86.995,82.804 86.995,109.982 ; 95.25,105.918 95.25,103.378 ; 97.79,107.442 97.79,103.378 ; 100.33,105.918 100.33,103.378 ; 102.743,80.518 102.743,107.442 ; 102.87,80.518 124.333,80.518 ; 113.792,60.452 113.792,61.087 113.792,72.517 ; 122.809,60.452 122.809,63.373 122.809,82.042 ; 122.809,75.438 129.794,75.438 ; 124.333,72.517 113.792,72.517 ; 128.27,76.962 128.27,60.452 129.794,60.452 ; 82.804,64.516 85.344,64.516 ; 82.804,64.516 82.804,67.056 ; 82.804,67.056 85.344,67.056 85.344,64.516 ; 95.25,103.378 97.79,103.378 ; 95.25,103.378 95.25,100.838 97.79,100.838 ; 97.79,100.838 97.79,103.378 ; 97.79,100.838 100.33,100.838 100.33,103.378 ; 97.79,103.378 100.33,103.378 ; 111.252,72.517 113.792,72.517 ; 111.252,72.517 111.252,75.057 113.792,75.057 ; 111.252,72.517 111.252,69.977 113.792,69.977 116.332,69.977 116.332,72.517 116.332,75.057 113.792,75.057 ; 113.792,72.517 113.792,75.057